# EAGLE board CT_schematic (EAGLE 7.6.0)

Size 100 x 80 mm. Coordinates in mm from the lower left corner, seen from the top.
Outline: 0,0 100,0 100,80 0,80 0,0
Copper layers (1*16): Top 0.035mm / dielectric 1.5mm / Bottom 0.035mm
Design rules "default": minimum track width 10mil, minimum drill 24mil, track to track 8mil, track to pad 8mil, pad to pad 8mil, via to via 8mil, smd to smd 8mil, copper to edge 40mil, drill to drill 8mil, minimum pad ring 10mil, minimum via ring 8mil, stop-mask expansion 4mil, vias tented up to drill 0mil, thermal gap 10mil

## Footprints (pad centres in the part's own frame; a part is rotated, then mirrored left to right if it is on the bottom)
C0603 = smd 0.8 x 0.8: 1 -0.762,0; 2 0.762,0
C0402 = smd 0.5 x 0.5: 1 -0.508,0; 2 0.508,0
C0805 = smd 1.2 x 1.3: 1 -1.016,0; 2 1.016,0
C1206 = smd 1.3 x 1.6: 1 -1.524,0; 2 1.524,0
L0603 = smd 0.8 x 0.8: 1 -0.762,0; 2 0.762,0
L0805 = smd 1.2 x 1.3: 1 -1.016,0; 2 1.016,0
R0603 = smd 0.8 x 0.8: 1 -0.762,0; 2 0.762,0
UFQFPN32 = smd 0.6 x 0.3: 1 -2.35,1.75; 2 -2.35,1.25; 3 -2.35,0.75; 4 -2.35,0.25; 5 -2.35,-0.25; 6 -2.35,-0.75; 7 -2.35,-1.25; 8 -2.35,-1.75; 17 2.35,-1.75; 18 2.35,-1.25; 19 2.35,-0.75; 20 2.35,-0.25; 21 2.35,0.25; 22 2.35,0.75; 23 2.35,1.25; 24 2.35,1.75 | smd 0.3 x 0.6: 9 -1.75,-2.35; 10 -1.25,-2.35; 11 -0.75,-2.35; 12 -0.25,-2.35; 13 0.25,-2.35; 14 0.75,-2.35; 15 1.25,-2.35; 16 1.75,-2.35; 25 1.75,2.35; 26 1.25,2.35; 27 0.75,2.35; 28 0.25,2.35; 29 -0.25,2.35; 30 -0.75,2.35; 31 -1.25,2.35; 32 -1.75,2.35 | smd 3.45 x 3.45: EPAD 0,0
TST-110-05-T-D-RA = drill 1 pad 1.7 square: 1 0,0 | drill 1 pad 1.7: 2 0,2.54; 3 2.54,0; 4 2.54,2.54; 5 5.08,0; 6 5.08,2.54; 7 7.62,0; 8 7.62,2.54; 9 10.16,0; 10 10.16,2.54; 11 12.7,0; 12 12.7,2.54; 13 15.24,0; 14 15.24,2.54; 15 17.78,0; 16 17.78,2.54; 17 20.32,0; 18 20.32,2.54; 19 22.86,0; 20 22.86,2.54
TDFN-8/6MM = smd 0.3 x 0.75: 1 0,0; 2 0.5,0; 3 1,0; 4 1.5,0; 5 1.5,3; 6 1,3; 7 0.5,3; 8 0,3
TSSOP20-I = smd 0.4 x 1.35: 1 -2.925,-2.875; 2 -2.275,-2.875; 3 -1.625,-2.875; 4 -0.975,-2.875; 5 -0.325,-2.875; 6 0.325,-2.875; 7 0.975,-2.875; 8 1.625,-2.875; 9 2.275,-2.875; 10 2.925,-2.875; 11 2.925,2.875; 12 2.275,2.875; 13 1.625,2.875; 14 0.975,2.875; 15 0.325,2.875; 16 -0.325,2.875; 17 -0.975,2.875; 18 -1.625,2.875; 19 -2.275,2.875; 20 -2.925,2.875
HTSS-105-01-G-D = drill 1 pad 1.8 square: 1 0,0 | drill 1 pad 1.8: 2 0,2.54; 3 2.54,0; 4 2.54,2.54; 5 5.08,0; 6 5.08,2.54; 7 7.62,0; 8 7.62,2.54; 9 10.16,0; 10 10.16,2.54
XCVR_SPBTLE-RF = smd 1.6 x 1: 1 -6.75,0.33; 2 -6.75,-0.94; 3 -6.75,-2.21; 4 -6.75,-3.48; 5 -6.75,-4.75; 7 6.75,-4.75; 8 6.75,-3.48; 9 6.75,-2.21; 10 6.75,-0.94; 11 6.75,0.33 | smd 1 x 1.6: 6 -2.75,-5.75
ASFL1 = smd 1.7 x 1.5: 1 -1.27,-1.1; 2 1.27,-1.1; 3 1.27,1.1; 4 -1.27,1.1
TSOT-23-5 = smd 1.3 x 0.62: 1 -1.31,0.95; 2 -1.31,0; 3 -1.31,-0.95; 4 1.31,-0.95; 5 1.31,0.95
DFN8_2X3MC = smd 0.813 x 0.305: 1 -1.398,0.75; 2 -1.398,0.25; 3 -1.398,-0.25; 4 -1.398,-0.75; 5 1.398,-0.75; 6 1.398,-0.25; 7 1.398,0.25; 8 1.398,0.75 | smd 1.753 x 1.549: 9 0,0
JST-2-SMD = smd 1 x 4.6: 1 -1,-3.7; 2 1,-3.7 | smd 1.6 x 3.4: NC1 -3.4,1.5; NC2 3.4,1.5
FCI_10118193-0001LF = smd 0.4 x 1.35: 1 -1.3,2.675; 2 -0.65,2.675; 3 0,2.675; 4 0.65,2.675; 5 1.3,2.675 | smd 1.6 x 1.4: 6 -3.2,2.45; 7 3.2,2.45 | smd 1.9 x 1.9: 8 -1.2,0; 9 1.2,0 | hole 0.5: -3.3,0; 3.3,0
SON-6 = smd 0.55 x 0.3: 1 -0.355,0.5 | smd 0.52 x 0.3: 2 -0.37,0; 3 -0.37,-0.5; 4 0.37,-0.5; 5 0.37,0; 6 0.37,0.5
SW_4-1437565-2 = smd 1.4 x 2.1: 1 -2.23,4.55; 2 -2.23,-4.55; 3 2.23,4.55; 4 2.23,-4.55
LGM67K-G1J2-24-Z = smd 0.8 x 1.4: A -2,0; C 0,0
NC7SZ125M5X = smd 1.3 x 0.7: 1 -1.3,0.95; 2 -1.3,0; 3 -1.3,-0.95; 4 1.3,-0.95; 5 1.3,0.95

## Placement (x,y rotation side)
C1  1e-07  [C0603]  -22.86,60.96 0 top  (outside the outline)
C2  1e-07  [C0603]  -26.67,60.96 0 top  (outside the outline)
C3  1e-07  [C0603]  -30.48,60.96 0 top  (outside the outline)
C4  1e-07  [C0603]  -34.29,60.96 0 top  (outside the outline)
C5  4.7e-06  [C0603]  -19.05,60.96 0 top  (outside the outline)
C6  1e-08  [C0603]  -38.1,60.96 0 top  (outside the outline)
C7  1e-06  [C0603]  -41.91,60.96 0 top  (outside the outline)
C8  1e-07  [C0402]  -30.48,66.04 0 top  (outside the outline)
C9  1e-08  [C0402]  -34.29,66.04 0 top  (outside the outline)
C10  1e-07  [C0402]  -38.1,66.04 0 top  (outside the outline)
C11  1e-07  [C0402]  -41.91,66.04 0 top  (outside the outline)
C12  1e-07  [C0402]  -45.72,66.04 0 top  (outside the outline)
C13  1e-07  [C0402]  -49.53,66.04 0 top  (outside the outline)
C14  1e-07  [C0402]  -53.34,66.04 0 top  (outside the outline)
C15  1e-07  [C0402]  -57.15,66.04 0 top  (outside the outline)
C16  1e-06  [C0603]  -45.72,60.96 0 top  (outside the outline)
C17  1e-07  [C0402]  -60.96,66.04 0 top  (outside the outline)
C18  1e-08  [C0402]  -64.77,66.04 0 top  (outside the outline)
C19  1e-05  [C0805]  -40.64,49.53 0 top  (outside the outline)
C20  1e-05  [C0805]  -45.72,49.53 0 top  (outside the outline)
C21  1e-07  [C0402]  -15.24,71.12 0 top  (outside the outline)
C22  1e-05  [C1206]  -64.77,41.91 0 top  (outside the outline)
C23  1e-05  [C1206]  -16.51,49.53 0 top  (outside the outline)
C24  1e-08  [C0402]  -19.05,71.12 0 top  (outside the outline)
C25  1e-08  [C0402]  -22.86,71.12 0 top  (outside the outline)
C26  1e-08  [C0402]  -26.67,71.12 0 top  (outside the outline)
F1  240.0  [L0603]  -49.53,60.96 0 top  (outside the outline)
I1  2.2e-06  [L0805]  -50.8,49.53 0 top  (outside the outline)
R1  10000.0  [R0603]  -35.56,55.88 0 top  (outside the outline)
R2  1000.0  [R0603]  -53.34,60.96 0 top  (outside the outline)
R3  1600.5  [R0603]  -57.15,60.96 0 top  (outside the outline)
R4  4700.0  [R0603]  -60.96,60.96 0 top  (outside the outline)
R5  4700.0  [R0603]  -64.77,60.96 0 top  (outside the outline)
R6  2200.0  [R0603]  -15.24,66.04 0 top  (outside the outline)
R7  2200.0  [R0603]  -19.05,66.04 0 top  (outside the outline)
R8  10000.0  [R0603]  -40.64,55.88 0 top  (outside the outline)
R9  10000.0  [R0603]  -45.72,55.88 0 top  (outside the outline)
R10  10000.0  [R0603]  -50.8,55.88 0 top  (outside the outline)
R11  100000.0  [R0603]  -15.24,55.88 0 top  (outside the outline)
R12  47000.0  [R0603]  -55.88,55.88 0 top  (outside the outline)
R13  220000.0  [R0603]  -20.32,55.88 0 top  (outside the outline)
R14  1000000.0  [R0603]  -63.5,49.53 0 top  (outside the outline)
R15  10000.0  [R0603]  -60.96,55.88 0 top  (outside the outline)
R16  10000.0  [R0603]  -66.04,55.88 0 top  (outside the outline)
R17  9100.0  [R0603]  -22.86,66.04 0 top  (outside the outline)
R18  680000.0  [R0603]  -25.4,55.88 0 top  (outside the outline)
R19  120000.0  [R0603]  -30.48,55.88 0 top  (outside the outline)
R20  2000.0  [R0603]  -26.67,66.04 0 top  (outside the outline)
R21  10000.0  [R0603]  -15.24,60.96 0 top  (outside the outline)
U1  STM32F301K6U6  [UFQFPN32]  -39.37,22.86 0 top  (outside the outline)
U2  TST-110-05-T-D-RA  [TST-110-05-T-D-RA]  -46.99,40.64 0 top  (outside the outline)
U3  24AA00T-I/MNY  [TDFN-8/6MM]  -24.13,33.02 0 top  (outside the outline)
U4  SP3203ECY-L/TR  [TSSOP20-I]  -60.96,6.35 0 top  (outside the outline)
U5  HTSS-105-01-G-D  [HTSS-105-01-G-D]  -58.42,21.59 0 top  (outside the outline)
U6  SPBTLE-RF  [XCVR_SPBTLE-RF]  -21.59,10.16 0 top  (outside the outline)
U7  ASFL1-25MHZ-NCS  [ASFL1]  -40.64,34.29 0 top  (outside the outline)
U8  ltc3406es5  [TSOT-23-5]  -55.88,49.53 0 top  (outside the outline)
U9  MCP73831T-2ACI/MC  [DFN8_2X3MC]  -35.56,69.85 0 top  (outside the outline)
U10  S2B-PH-SM4-TB(LF)(SN)  [JST-2-SMD]  -22.86,25.4 0 top  (outside the outline)
U11  10118193-0001LF  [FCI_10118193-0001LF]  -49.53,33.02 0 top  (outside the outline)
U12  TPS3895ADRYR  [SON-6]  -29.21,69.85 0 top  (outside the outline)
U13  4-1437565-2  [SW_4-1437565-2]  -45.72,6.35 0 top  (outside the outline)
U14  Q65110A2395  [LGM67K-G1J2-24-Z]  -53.34,41.91 0 top  (outside the outline)
U15  nc7sz125m5x  [NC7SZ125M5X]  -21.59,49.53 0 top  (outside the outline)
U16  nc7sz125m5x  [NC7SZ125M5X]  -27.94,49.53 0 top  (outside the outline)
U17  nc7sz125m5x  [NC7SZ125M5X]  -34.29,49.53 0 top  (outside the outline)

## Library data of the parts
C1-C26 F1 I1 R1-R21 U1-U17 = circuit_tree

## Nets
CLK_U1_2: U1.2 U7.3
GND: C1.2 C2.2 C3.2 C4.2 C5.2 C6.2 C7.2 C8.2 C9.2 C10.2 C11.2 C14.2 C15.2 C16.2 C17.2 C18.2 C19.2 C20.1 C20.2 C21.2 C22.2 C23.2 C24.2 C25.2 C26.2 R2.2 R8.2 R11.2 R12.2 R13.2 R17.2 R19.2 R20.2 U1.6 U1.16 U1.32 U1.EPAD U2.4 U2.6 U2.8 U2.10 U2.12 U2.14 U2.16 U2.18 U2.20 U3.4 U4.18 U5.9 U6.6 U7.2 U8.2 U9.6 U9.9 U10.2 U11.5 U11.6 U11.7 U11.8 U11.9 U12.2 U14.C U15.2 U15.3 U16.1 U16.3 U17.1 U17.3
INPUT_USBPOWER_5V: C22.1 R21.2 U9.1 U9.2 U11.1
NET_U1_4: R5.1 U1.4 U17.4
NET_U1_5: C6.1 C7.1 F1.1 U1.5
NET_U1_25: R6.1 U1.25 U3.6
NET_U1_28: R3.1 U1.28 U14.A
NET_U1_29: R1.1 U1.29 U13.3 U13.4
NET_U1_30: R7.1 U1.30 U3.5
NET_U1_31: R8.1 U1.31
NET_U4_1: C12.1 U4.1
NET_U4_2: C14.1 U4.2
NET_U4_3: C12.2 U4.3
NET_U4_4: C13.1 U4.4
NET_U4_5: C13.2 U4.5
NET_U4_6: C15.1 U4.6
NET_U4_20: U4.20
NET_U5_3: U4.14 U5.3
NET_U5_4: U4.13 U5.4
NET_U5_5: U4.17 U5.5
NET_U5_6: U4.16 U5.6
NET_U6_10: R10.1 U6.10
NET_U6_11: R4.1 U6.11 U16.4
NET_U8_1: U8.1
NET_U8_3: I1.1 U8.3
NET_U8_5: R13.1 R14.1 U8.5
NET_U8_ATNET_3: I1.2 R14.2
NET_U9_5: R21.1 U9.5
NET_U9_8: R20.1 U9.8
NET_U12_1: R16.1 R17.1 U12.1
NET_U12_3: R18.2 R19.1 U12.3
NET_U12_4: R15.1 U12.4 U15.4 U16.2 U17.2
NET_U13_1: R2.1 U13.1 U13.2
PROC_GPIO_TO_U6_SPI_IRQ: R12.1 U1.11 U6.4
PROC_SPI2_MISO: U1.20 U6.8
PROC_SPI2_MOSI: U1.21 U6.9
PROC_SPI2_SCK: R11.1 U1.3 U6.7
PROC_SYS_JTCK_SWCLK: U1.24 U2.9
PROC_SYS_JTDO_TRACESWO: U1.26 U2.13
PROC_SYS_JTMS_SWDIO: U1.23 U2.7
PROC_USART2_CTS: U1.7 U4.8
PROC_USART2_RTS: U1.8 U4.10
PROC_USART2_RX: U1.10 U4.11
PROC_USART2_TX: U1.9 U4.7
RST_OUT_U2_SRESET_B: R9.1 U2.15 U15.1
VCC_S1_3V7: C19.1 C23.1 U8.4 U9.3 U9.4 U10.1
VCC_TIER1_3V3: C1.1 C2.1 C3.1 C4.1 C5.1 C8.1 C9.1 C10.1 C11.1 C16.1 C17.1 C18.1 C20.2 C21.1 C24.1 C25.1 C26.1 F1.2 I1.2 R1.2 R3.2 R4.2 R5.2 R6.2 R7.2 R9.2 R10.2 R14.2 R15.2 R16.2 R18.1 U1.1 U1.17 U2.1 U3.8 U4.12 U4.19 U6.5 U7.4 U12.6 U15.5 U16.5 U17.5

## Tracks (layer width: path | path; a pad name or v marks a point on that pad's centre or on a via)
CLK_U1_2  (1 unrouted)
GND  (67 unrouted)
INPUT_USBPOWER_5V  (4 unrouted)
NET_U1_4  (2 unrouted)
NET_U1_5  (3 unrouted)
NET_U1_25  (2 unrouted)
NET_U1_28  (2 unrouted)
NET_U1_29  (3 unrouted)
NET_U1_30  (2 unrouted)
NET_U1_31  (1 unrouted)
NET_U4_1  (1 unrouted)
NET_U4_2  (1 unrouted)
NET_U4_3  (1 unrouted)
NET_U4_4  (1 unrouted)
NET_U4_5  (1 unrouted)
NET_U4_6  (1 unrouted)
NET_U5_3  (1 unrouted)
NET_U5_4  (1 unrouted)
NET_U5_5  (1 unrouted)
NET_U5_6  (1 unrouted)
NET_U6_10  (1 unrouted)
NET_U6_11  (2 unrouted)
NET_U8_3  (1 unrouted)
NET_U8_5  (2 unrouted)
NET_U8_ATNET_3  (1 unrouted)
NET_U9_5  (1 unrouted)
NET_U9_8  (1 unrouted)
NET_U12_1  (2 unrouted)
NET_U12_3  (2 unrouted)
NET_U12_4  (4 unrouted)
NET_U13_1  (2 unrouted)
PROC_GPIO_TO_U6_SPI_IRQ  (2 unrouted)
PROC_SPI2_MISO  (1 unrouted)
PROC_SPI2_MOSI  (1 unrouted)
PROC_SPI2_SCK  (2 unrouted)
PROC_SYS_JTCK_SWCLK  (1 unrouted)
PROC_SYS_JTDO_TRACESWO  (1 unrouted)
PROC_SYS_JTMS_SWDIO  (1 unrouted)
PROC_USART2_CTS  (1 unrouted)
PROC_USART2_RTS  (1 unrouted)
PROC_USART2_RX  (1 unrouted)
PROC_USART2_TX  (1 unrouted)
RST_OUT_U2_SRESET_B  (2 unrouted)
VCC_S1_3V7  (5 unrouted)
VCC_TIER1_3V3  (42 unrouted)